# Altium PCB MCU20.PcbDoc
Units mm, origin at the board's own origin, x right, y up, seen from the top; angles counter-clockwise.
Board outline 20.6 x 32.1 mm, 2 copper layers (Top Layer, Bottom Layer); 25 components, 23 nets, 97 pads, 9 vias.
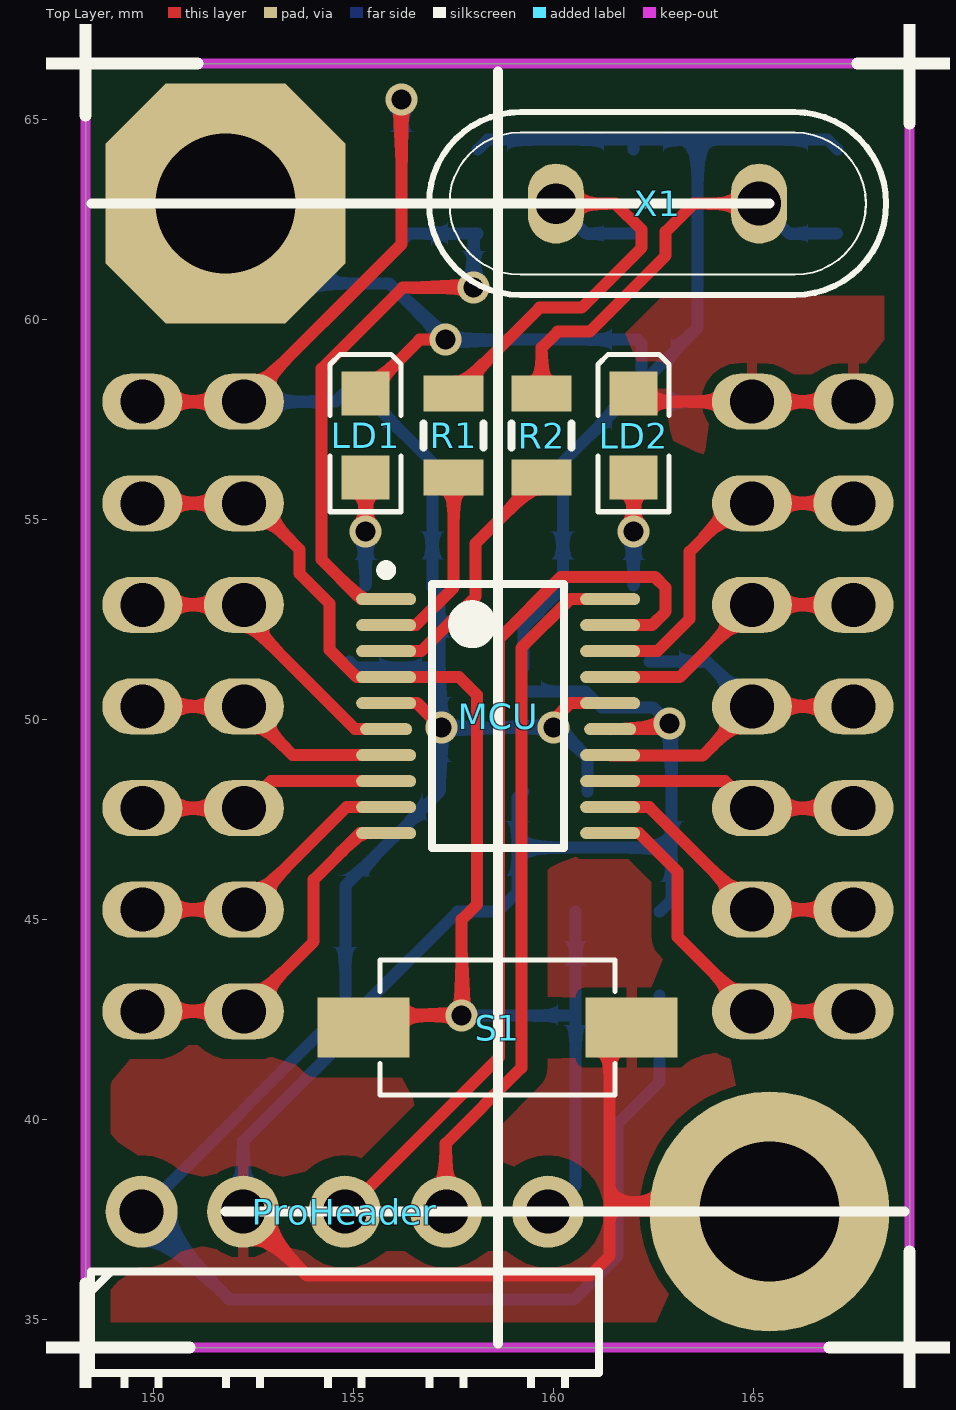
[diagram p0: Top Layer view]
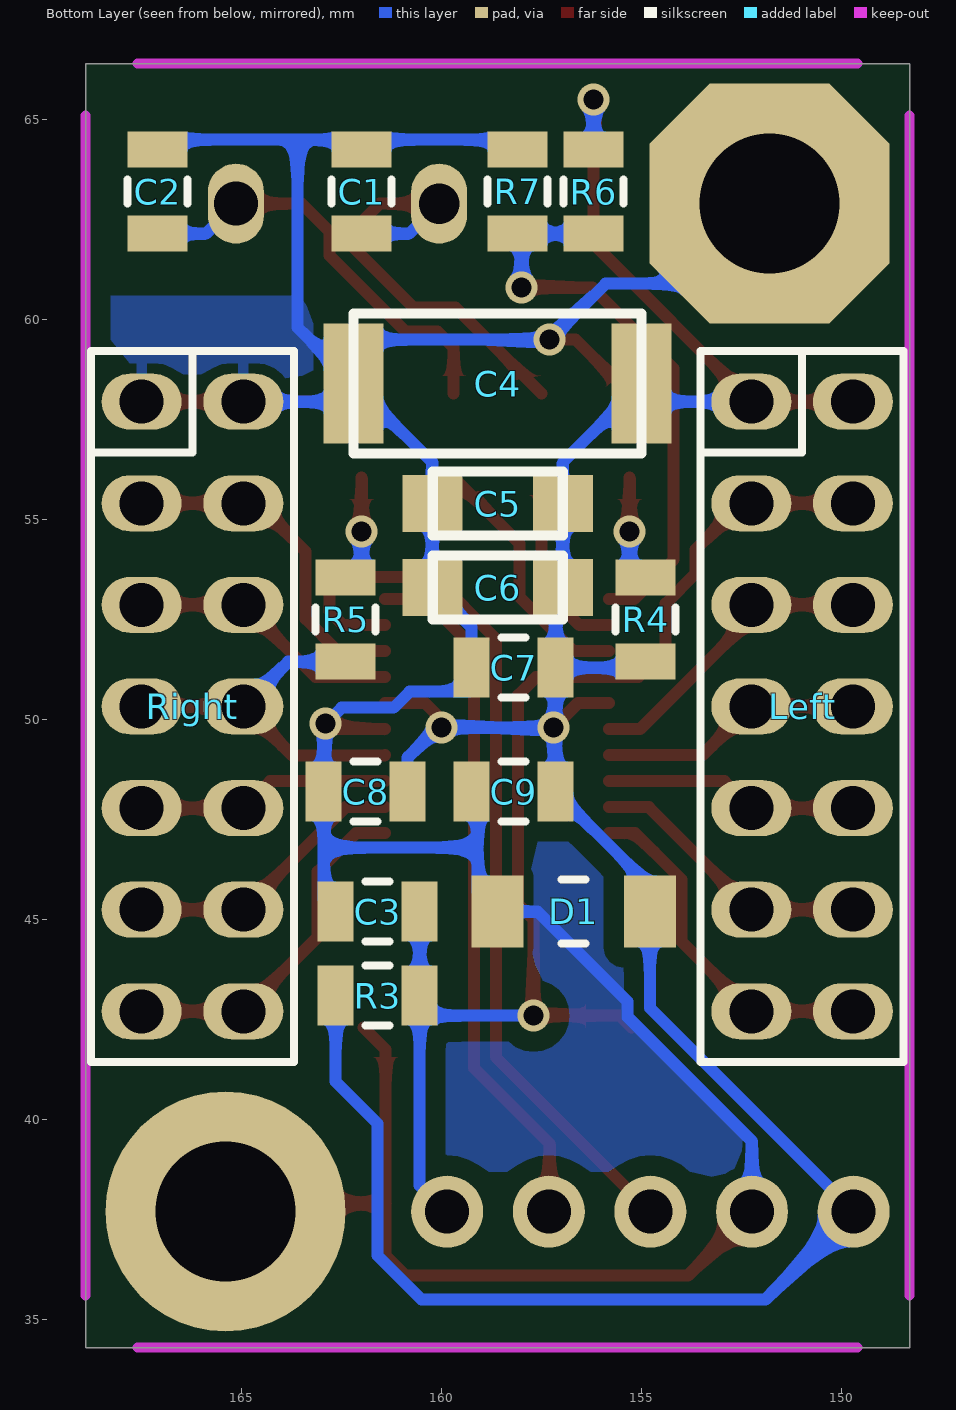
[diagram p1: Bottom Layer view, seen from below]
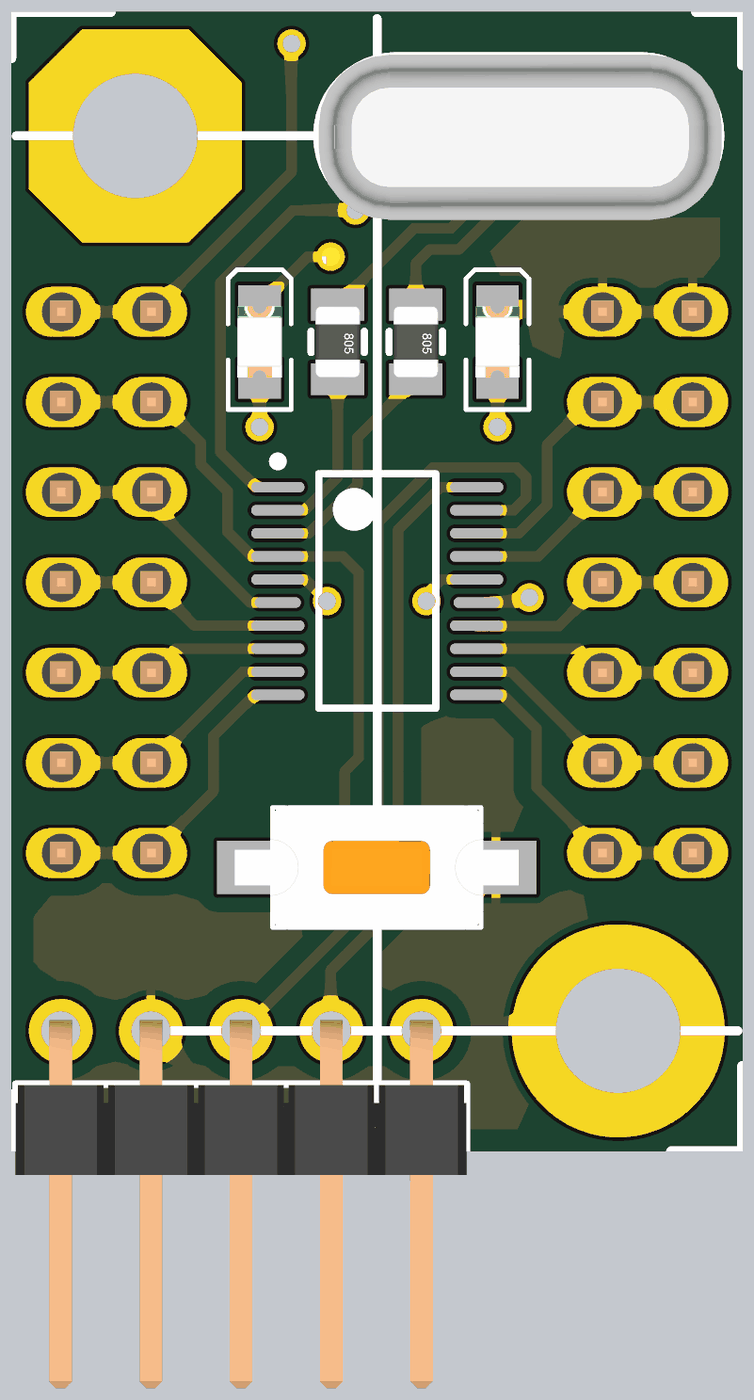
[diagram p2: 3D render of the assembled board from above, using the file's embedded part models]
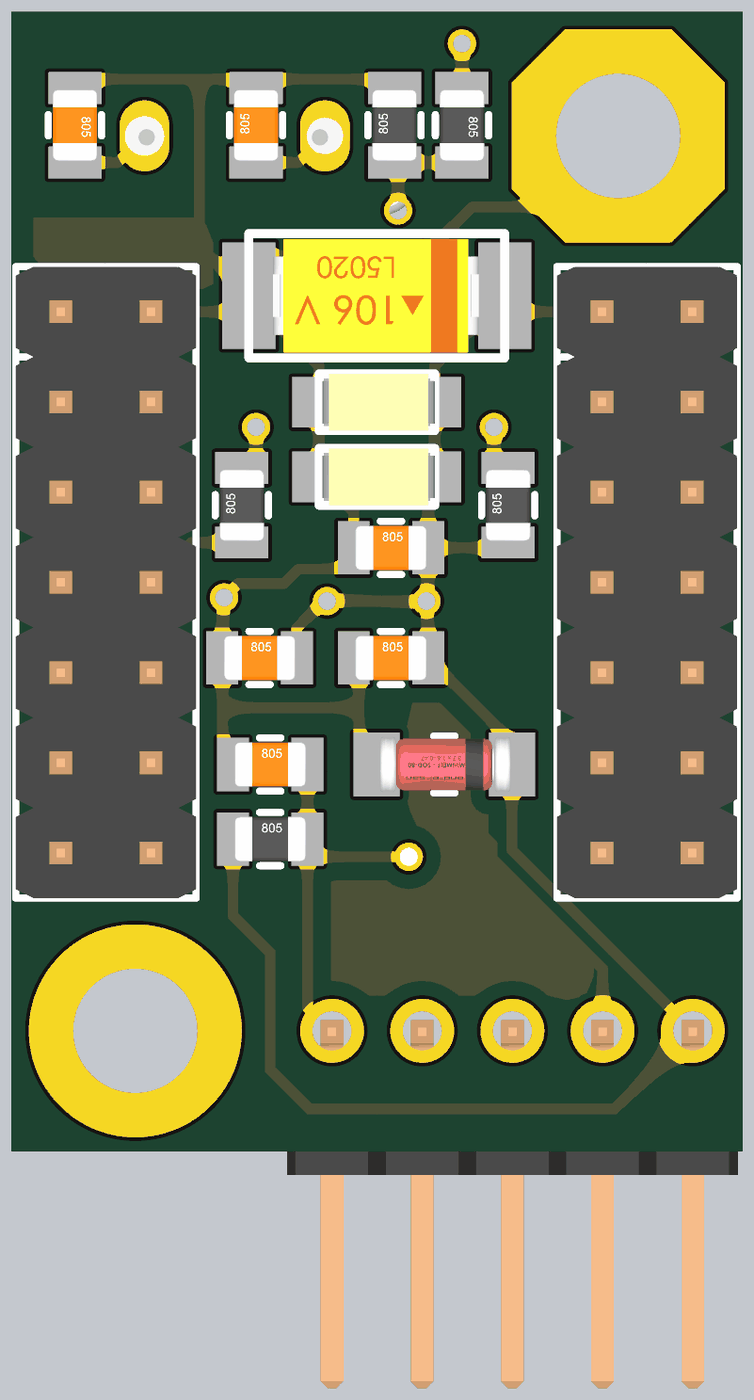
[diagram p3: 3D render of the assembled board from below, using the file's embedded part models]

## Layer stack, top to bottom
Top Solder: solder mask 0.0102, Solder Resist, Dk 3.5
Top Layer: signal copper 0.0356
Dielectric 1: dielectric 0.32, FR-4, Dk 4.8
Bottom Layer: signal copper 0.0356
Bottom Solder: solder mask 0.0102, Solder Resist, Dk 3.5

## Board outline
148.3,34.3 168.9,34.3 168.9,66.4 148.3,66.4

## Design rules (kind name [scope] priority, off if disabled: settings)
Clearance [All] p1: gap=0.254 ignorepadtopadclearanceinfootprint=FALSE except(0: Arc-Hole Track-Hole SMDPad-Hole THPad-Hole Via-Hole Fill-Hole Poly-Hole Region-Hole Text-Hole; 0.5: Arc-Poly Track-Poly SMDPad-Poly THPad-Poly Via-Poly Fill-Poly Poly-Poly Poly-Region Poly-Text)
PolygonConnect [All] p1: connectstyle=Relief reliefconductorwidth=0.254 reliefentries=4 polygonreliefangle="90 Angle" airgapwidth=0.254
RoutingVias [All] p1: holewidth=0.711 width=1.27 viastyle="Through Hole" minholewidth=0.711 minwidth=1.27 maxholewidth=0.711 maxwidth=1.27
SolderMaskExpansion [All] p1: expansion=0.102
Width [All] p1: maxlimit=0.6 minlimit=0.3 preferedwidth=0.3
30 further rules are at their usual default settings.

## Components (designator, comment, footprint, x,y, rotation, side; value= is the part's Value field where it differs from the comment)
C1 "20pF" "SMD 805 CAP" 162,63.2 r90 bottom
C2 "20pF" "SMD 805 CAP" 167.1,63.2 r270 bottom
C3 "100nF" "SMD 805 CAP" 161.6,45.2 r180 bottom
C4 "220uF" "Cap D" 158.6,58.4 r0 bottom
C5 "4.7uF" MY_CAP_SMD-A 158.6,55.4 r0 bottom value=3300u
C6 "1uF" MY_CAP_SMD-A 158.6,53.3 r0 bottom value=3300u
C7 "100nF" "SMD 805 CAP" 158.2,51.3 r180 bottom
C8 "100nF" "SMD 805 CAP" 161.9,48.2 r180 bottom
C9 "100nF" "SMD 805 CAP" 158.2,48.2 r180 bottom
D1 "Zener@3.6V" MiniMelf 156.7,45.2 r180 bottom
LD1 "150080BS75000" LED_0805_Blue 155.3,57.1 r90 top
LD2 "150080BS75000" LED_0805_Blue 162,57.1 r90 top
Left "WE-2.54 mm Pin Header & Jumper 61301421121" 61301421121 150.988,50.328 r270 bottom
MCU "STM32F030F4P6" STM-TSSOP20_L 158.614,50.085 r0 top
ProHeader "WE-2.54 mm Pin Header & Jumper 61300511021" 61300511021 161.13,35.16 r0 top
R1 "0" "SMD 805" 157.5,57.1 r270 top
R2 "220" "SMD 805" 159.7,57.1 r270 top
R3 "10K" "SMD 805" 161.6,43.1 r180 bottom
R4 "330" "SMD 805" 154.9,52.5 r90 bottom
R5 "470" "SMD 805" 162.4,52.5 r90 bottom
R6 "10K" "SMD 805" 156.2,63.2 r270 bottom
R7 "510" "SMD 805" 158.1,63.2 r90 bottom
Right "WE-2.54 mm Pin Header & Jumper 61301421121" 61301421121 166.228,50.328 r270 bottom
S1 "Tact Switch" 4341x10438x6 158.6,42.3 r0 top
X1 "16MHz-10ppm" My_Crystal 162.6,62.9 r180 top

## Footprints (in the part's own frame and the unit in brackets; to place one, negate y for a bottom-side part, rotate by r counter-clockwise, add the part's x,y. Pads: shape width x height; smd on the part's side, far side on the other; paste and mask are expansions set on the pad)
4341x10438x6 [mm] "6.0*3.5mm vertical type, SMD, height 4.3mm, white actuator, 260gf, T&R"
  rect 2.3x1.5 smd: 1(-3.35,0) 2(3.35,0)
  silkscreen extent -2.94,-1.69 2.94,1.69, body extent -4,-1.75 4,1.75, height 4.31
61300511021 [mm] "5 pins, 1 row, right angled, gold plating"
  round 1.8 hole 1.1: 1(-11.43,2.54) 2(-8.89,2.54) 3(-6.35,2.54) 4(-3.81,2.54) 5(-1.27,2.54)
  silkscreen extent -12.7,-7.34 0,1.04, body extent -12.7,-7.52 0,2.84, height 2.55
61301421121 [mm] "14 pins, dual pin, straight, gold plating"
  oval 1.4x2 hole 1.1: 1(-7.62,-1.27) 2(-5.08,-1.27) 3(-2.54,-1.27) 4(0,-1.27) 5(2.54,-1.27) 6(5.08,-1.27) 7(7.62,-1.27) 8(7.62,1.27) 9(5.08,1.27) 10(2.54,1.27) 11(0,1.27) 12(-2.54,1.27) 13(-5.08,1.27) 14(-7.62,1.27)
  silkscreen extent -8.89,-2.54 8.89,2.54, body extent -8.89,-2.54 8.89,2.54, height 8.55
"Cap D" [mm]
  rect 1.5x3 smd: 1(-3.6,0) 2(3.6,0)
  silkscreen extent -3.6,-1.75 3.6,1.75, body extent -2.87,-1.6 2.93,1.6, height 2.6
LED_0805_Blue [mm] "Chip LED, 2-Leads, Body 2.0x1.3mm, IPC Medium Density"
  rect 1.1x1.2 smd: 1(-1.05,0) 2(1.05,0)
  silkscreen extent -1.91,-0.89 2.03,0.89, body extent -1,-0.63 1,0.62, height 0.68
MiniMelf [mm]
  rect 1.3x1.8 smd: 1(-1.905,0) 2(1.905,0)
  silkscreen extent -0.3,-0.8 0.3,0.8, body extent -1.82,-0.8 1.88,0.8, height 1.6
MY_CAP_SMD-A [mm] "1.6X3.25"
  rect 1.5x1.42 smd: +(-1.63,0) -(1.63,0)
  silkscreen extent -1.63,-0.8 1.62,0.8, body extent -1.64,-0.8 1.54,0.8, height 1.77
My_Crystal [mm]
  oval 1.4x2 hole 1.1: 1(-2.54,0)
  oval 1.4x2 hole 1.016: 2(2.54,0)
  silkscreen extent -5.71,-2.29 5.71,2.29, body extent -5.71,-2.29 5.64,2.36, height 3.8
"SMD 805" [mm]
  rect 0.9x1.5 smd: 1(1.05,0) 2(-1.05,0)
  silkscreen extent -0.3,-0.75 0.3,0.75, body extent -1,-0.62 1,0.63, height 0.78
"SMD 805 CAP" [mm]
  rect 0.9x1.5 smd: 1(1.05,0) 2(-1.05,0)
  silkscreen extent -0.3,-0.75 0.3,0.75, body extent -1,-0.62 1,0.63, height 0.78
STM-TSSOP20_L [mm] "SOP, 20-Leads, Body 6.6x4.5mm, Pitch 0.65mm, IPC High Density"
  oval 1.5x0.3 smd: 1(-2.8,2.925) 2(-2.8,2.275) 3(-2.8,1.625) 4(-2.8,0.975) 5(-2.8,0.325) 7(-2.8,-0.975) 8(-2.8,-1.625) 9(-2.8,-2.275) 10(-2.8,-2.925) 11(2.8,-2.925) 12(2.8,-2.275) 13(2.8,-1.625) 14(2.8,-0.975) 16(2.8,0.325) 17(2.8,0.975) 18(2.8,1.625) 19(2.8,2.275) 20(2.8,2.925)
  oval 1.3x0.3 smd: 6(-2.8,-0.325) 15(2.8,-0.325)
  silkscreen extent -2.92,-3.3 1.65,3.77, body extent -2.25,-3.3 2.25,3.3, height 1.2

## Part data
C1 C2 C3 C7 C8 C9: library part "CAP without Pole"
C4: library part CAP
C5 C6: library part CAP_TANTAL_A, "3.2X1.6MM"
D1: library part "Diode 1N4007"
LD1 LD2: library part "WL-SMCW 0805  150080BS75000", "SMD mono-color Chip LED, WL-SMCW, Blue", Color=Blue, Manufacturer="W?th Elektronik eiSos GmbH", ComponentLink1Description=Manufacturer, ComponentLink1URL=http://www.we-online.de, ComponentLink2Description=Datasheet, ComponentLink2URL=http://katalog.we-online.com/led/datasheet/150080BS75000.pdf, Created by="Christin Otto", Created Date="June 2013", partNo=150080BS75000
Left Right: "WR-PHD 2.54 mm Dual Pin Header", Manufacturer="Würth Elektronik eiSos GmbH", partNo=61301421121, ComponentLink1 Description=Manufacturer, ComponentLink1URL=http://www.we-online.com, ComponentLink2 Description=Datasheet, ComponentLink2URL=http://katalog.we-online.de/em/datasheet/6130xx21121.pdf, Created by="Karrer Zheng", Created Date="25 March 2013", NoPins=14
MCU: "ARM Cortex-M0 32-bit MCU, 16 KB Flash, 4 KB Internal RAM, 15 I/Os, 20-pin TSSOP, -40 to 85 degC, Tube", I/Os (High Current)=15, Operating Frequency(F) (Processor speed) (MHz)=48, Supplier Part Number 1=497-14044-5-ND, Supply Voltage(Vcc) min (V)=2.4, ComponentLink1Description="Manufacturer URL", ComponentLink1URL=http://www.st.com/web/en/home.html, ComponentLink2Description=Datasheet, ComponentLink2URL=http://www.st.com/st-web-ui/static/active/en/resource/technical/document/datasheet/DM00088500.pdf, ComponentLink3Description="Package Specification", ComponentLink3URL=http://www.st.com/st-web-ui/static/active/en/resource/technical/document/datasheet/DM00065136.pdf, Core="ARM Cortex-M0", DatasheetVersion="Rev. 1", FLASH Size (Prog) (kB)=16, Internal RAM Size (kB)=4, Mounting Technology="Surface Mount", PackageDescription="20-Pin Thin Shrink Small Outline Package, 6.5 x 4.4 mm Body, 0.65 mm Pitch", PackageReference=TSSOP20, PackageVersion="Rev. 1, 11/2012", Packing=Tube, PartNumber=STM32F030F4P6, Supplier 1=Digi-Key, Supplier 2=Newark, Supplier 3=Mouser, Supplier Part Number 2=06X3648, Supplier Part Number 3=511-STM32F030F4P6
ProHeader: "WR-PHD 2.54mm Angled Pin Header", Manufacturer="Würth Elektronik eiSos GmbH", partNo=61300511021, ComponentLink1 Description=Manufacturer, ComponentLink1URL=http://www.we-online.com, ComponentLink2 Description=Datasheet, ComponentLink2URL=http://katalog.we-online.de/em/datasheet/6130xx11021.pdf, Created by="Karrer Zheng", Created Date="25 March 2013", NoPins=05
R1 R2 R3 R4 R5 R6 R7: library part Resistor
S1: library part "WS-TASV, 434111043826", "WS-TASV 6.0x3.5 mm SMD", Manufacturer="Wurth Elektronik", partNo=434111043826, ComponentLink1Description=Manufacturer, ComponentLink1URL=http://www.we-online.de, ComponentLink2Description=Datasheet, ComponentLink2URL=http://katalog.we-online.de/em/datasheet/4341x1xxx8x6.pdf, Created by="Baojun Chen", Created Date=Dec.2015
X1: library part CRYSTAL, "Crystal"

## Free pads (board coordinates)
  oct 6x6 hole 3.5: 2(151.8,62.9)
  round 6 hole 3.5: 2(165.4,37.7)

## Via types
v1: diameter 0.8, hole 0.5, Top Layer to Bottom Layer, 9 vias

## Nets (pads, with @x,y where several pads share a name; then routed paths per layer and width w, separated by ;. In a path a pad name is that pad's centre, name@x,y a point inside that pad or via, vN(x,y) a via of type N, cw(c..) or ccw(c..) an arc to the next point about the centre after c; other vN are vias at no path point)
3.3V: C4.1 C5.+ C6.+ C7.1 C8.1 C9.1 D1.2 Left.1 Left.14 MCU.5 MCU.16 ProHeader.1 R3.2 R4.2 R6.2 | length 71.3
  Top Layer w0.3: Left.14 Left.1 156.2,61.89 v1(156.2,65.5) ; MCU.5 156.59,50.41 v1(157.2,49.8) ; v1(160,49.8) 160,49.999 160.41,50.41 MCU.16
  Bottom Layer w0.3: Left.1 154.548,57.948 C4.1 156.97,56.43 C5.+ C6.+ 157.15,53.12 C7.1 ; R4.2 155.05,51.3 C7.1 ; R6.2 v1(156.2,65.5) ; v1(157.2,49.8) v1(160,49.8) 160.1,49.8 160.85,49.05 C8.1 ; R3.2 162.65,40.95 161.6,39.9 161.6,36.6 160.5,35.5 151.9,35.5 ProHeader.1 154.795,42.795 D1.2 154.795,45.845 C9.1 C7.1
A0: Left.3 Left.12 MCU.6 | length 7.6
  Top Layer w0.3: Left.12 Left.3 152.258,52.542 155.04,49.76 MCU.6
A1: Left.4 Left.11 MCU.7 | length 6.6
  Top Layer w0.3: Left.11 Left.4 153.476,49.11 MCU.7
A2: Left.5 Left.10 MCU.8 | length 6.4
  Top Layer w0.3: Left.10 Left.5 152.93,48.46 MCU.8
A3: Left.6 Left.9 MCU.9 | length 7.2
  Top Layer w0.3: Left.9 Left.6 154.82,47.81 MCU.9
A4: Left.7 Left.8 MCU.10 | length 8.8
  Top Layer w0.3: Left.8 Left.7 154,44.45 154,46 155.16,47.16 MCU.10
A5: MCU.11 Right.7 Right.8 | length 8.9
  Top Layer w0.3: MCU.11 162.14,47.16 163.1,46.2 163.1,44.566 Right.8 Right.7
A6: MCU.12 Right.6 Right.9 | length 7.1
  Top Layer w0.3: MCU.12 162.396,47.81 Right.9 Right.6
A7: MCU.13 Right.5 Right.10 | length 6.4
  Top Layer w0.3: MCU.13 164.286,48.46 Right.10 Right.5
A9: MCU.17 Right.3 Right.12 | length 6.8
  Top Layer w0.3: MCU.17 163.15,51.06 Right.12 Right.3
A10: MCU.18 Right.2 Right.13 | length 8.6
  Top Layer w0.3: MCU.18 162.593,51.71 163.4,52.517 163.4,54.2 164.608,55.408 Right.13 Right.2
B1: MCU.14 R5.2 Right.4 Right.11 | length 9.6
  Top Layer w0.3: MCU.14 161.428,49.096 163.726,49.096 Right.11 Right.4
  Bottom Layer w0.3: R5.2 163.836,51.45 Right.11
GND: C1.1 C2.2 C3.2 C4.2 C5.- C6.- C7.2 C8.2 C9.2 D1.1 LD1.2 LD2.2 MCU.15 pad.2 ProHeader.2 R7.1 Right.1 Right.14 S1.2 | length 96.6
  Top Layer w0.3: ProHeader.2 153.84,36.1 160.9,36.1 161.4,36.6 161.4,37.9 ; LD1.2 156.65,59.5 v1(157.3,59.5) ; MCU.15 162.84,49.76 162.9,49.82 v1(162.9,49.9) ; S1.2 161.4,41.75 161.4,37.9 ; LD2.2 162.202,57.948 Right.14 Right.1 ; pad.2@165.4,37.7 165.2,37.9 161.4,37.9
  Bottom Layer w0.3: pad.2@151.8,62.9 153.8,60.9 155.9,60.9 v1(157.3,59.5) 162.1,59.5 162.2,59.4 C4.2 ; ProHeader.2 152.24,39.457 155.349,42.566 155.349,42.949 157.6,45.2 D1.1 159.1,45.695 159.1,46.8 ; R7.1 158.35,64.5 C1.1@162,64.5 ; C9.2 159.1,48.05 159.1,46.8 ; C7.2 159.25,52.32 C6.- C5.- 160.23,56.43 C4.2 ; C7.2@159.3,50.7 160.8,50.7 161.2,50.3 162.5,50.3 v1(162.9,49.9) 162.95,49.85 C8.2 162.95,46.8 ; C1.1 C1.1@162,64.5 ; C3.2 162.95,45.5 162.95,46.8 ; Right.14 162.652,57.948 C4.2 ; C2.2 166.85,64.5 163.6,64.5 ; 159.1,46.8 162.95,46.8 ; C1.1@162,64.5 163.6,64.5 ; C4.2 163.6,59.8 163.6,64.5
NetC1_2: C1.2 R1.2 X1.2 | length 11.6
  Top Layer w0.3: R1.2 159.65,60.3 160.7,60.3 162.2,61.8 162.2,62.246 161.546,62.9 X1.2 X1.2@159.82,62.9
  Bottom Layer w0.3: X1.2 160.81,62.15 C1.2
NetC2_1: C2.1 R2.2 X1.1 | length 10.4
  Top Layer w0.3: R2.2 159.7,59.3 160.1,59.7 160.9,59.7 162.8,61.6 162.8,62.2 163.5,62.9 X1.1@164.9,62.9
  Bottom Layer w0.3: X1.1 165.89,62.15 C2.1@167.08,62.15
NetLD1_1: LD1.1 R4.1 | length 2.7
  Top Layer w0.3: v1(155.3,54.7) LD1.1
  Bottom Layer w0.3: R4.1@155.3,53.35 v1(155.3,54.7)
NetLD2_1: LD2.1 R5.1 | length 2.7
  Top Layer w0.3: v1(162,54.7) LD2.1
  Bottom Layer w0.3: R5.1@162,53.35 v1(162,54.7)
NetMCU_1: MCU.1 R6.1 R7.2 | length 14.9
  Top Layer w0.3: MCU.1 155.19,53.01 154.2,54 154.2,58.771 156.229,60.8 v1(158,60.8)
  Bottom Layer w0.3: R6.1@156.3,62.05 R6.1 R7.2 158,62.05 v1(158,60.8)
NetMCU_2: MCU.2 R1.1 | length 4.8
  Top Layer w0.3: MCU.2 156.558,52.36 157.5,53.302 R1.1
NetMCU_3: MCU.3 R2.1 | length 6.5
  Top Layer w0.3: MCU.3 156.691,51.71 158.054,53.073 158.054,54.404 R2.1
NRST: C3.1 Left.2 Left.13 MCU.4 ProHeader.5 R3.1 S1.1 | length 32.6
  Top Layer w0.3: Left.13 Left.2 152.492,55.408 153.646,54.254 153.646,53.654 154.4,52.9 154.4,51.741 155.081,51.06 MCU.4 157.64,51.06 158.088,50.612 158.088,45.388 157.7,45 v1(157.7,42.6) 155.55,42.6 S1.1
  Bottom Layer w0.3: v1(157.7,42.6) R3.1@160.35,42.6 ; ProHeader.5@159.9,37.7 160.55,38.35 C3.1
SWCLK: MCU.20 ProHeader.4 | length 17.6
  Top Layer w0.3: ProHeader.4@157.3,37.7 157.3,39.4 159.196,41.296 159.196,51.796 160.41,53.01 MCU.20
SWDIO: MCU.19 ProHeader.3 | length 23
  Top Layer w0.3: ProHeader.3 158.642,41.562 158.642,52.025 160.181,53.564 162.536,53.564 162.8,53.3 162.8,52.7 162.46,52.36 MCU.19

## Polygon pours and split planes (outlines as drawn)
GND on Bottom Layer "Bottom" (solid, remove dead copper, pour order 0): 148.3,66.4 148.3,34.5 168.9,34.5 168.9,60.6 163,60.6 163,51 154.9,51 154.9,66.4
GND on Top Layer "Top" (solid, remove dead copper, pour order 2): 148.3,66.4 148.3,34.3 168.9,34.3 168.9,60.6 156.9,60.6 156.9,66.4

## Keep-outs
Keep-Out Layer:
  lines w0.254: 148.3,35.6 148.3,65.1 ; 149.6,34.3 167.6,34.3 ; 149.6,66.4 167.6,66.4 ; 168.9,35.6 168.9,65.1

## Silkscreen, mask and mechanical layers (free items; w line width, h text height)
Top Overlay:
  lines w0.254: 148.448,62.9 165.4,62.9 ; 151.8,37.7 168.768,37.7 ; 158.608,34.4 158.608,66.2
  lines w0.3: 139.6,34.3 150.9,34.3 ; 139.8,66.4 151.1,66.4 ; 148.3,24.6 148.3,35.9 ; 148.3,65.1 148.3,76.4 ; 166.9,34.3 178.2,34.3 ; 167.6,66.4 178.9,66.4 ; 168.9,25.4 168.9,36.7 ; 168.9,64.9 168.9,76.2
Mechanical 1:
  lines w0.254: 148.3,35.6 ccw(c149.6,35.6) 149.6,34.3 ; 148.3,65.1 cw(c149.6,65.1) 149.6,66.4 ; 167.6,34.3 ccw(c167.6,35.6) 168.9,35.6 ; 167.6,66.4 cw(c167.6,65.1) 168.9,65.1